# EAGLE board ad5272_arduino_ethernet_1 (EAGLE 8.1.1)
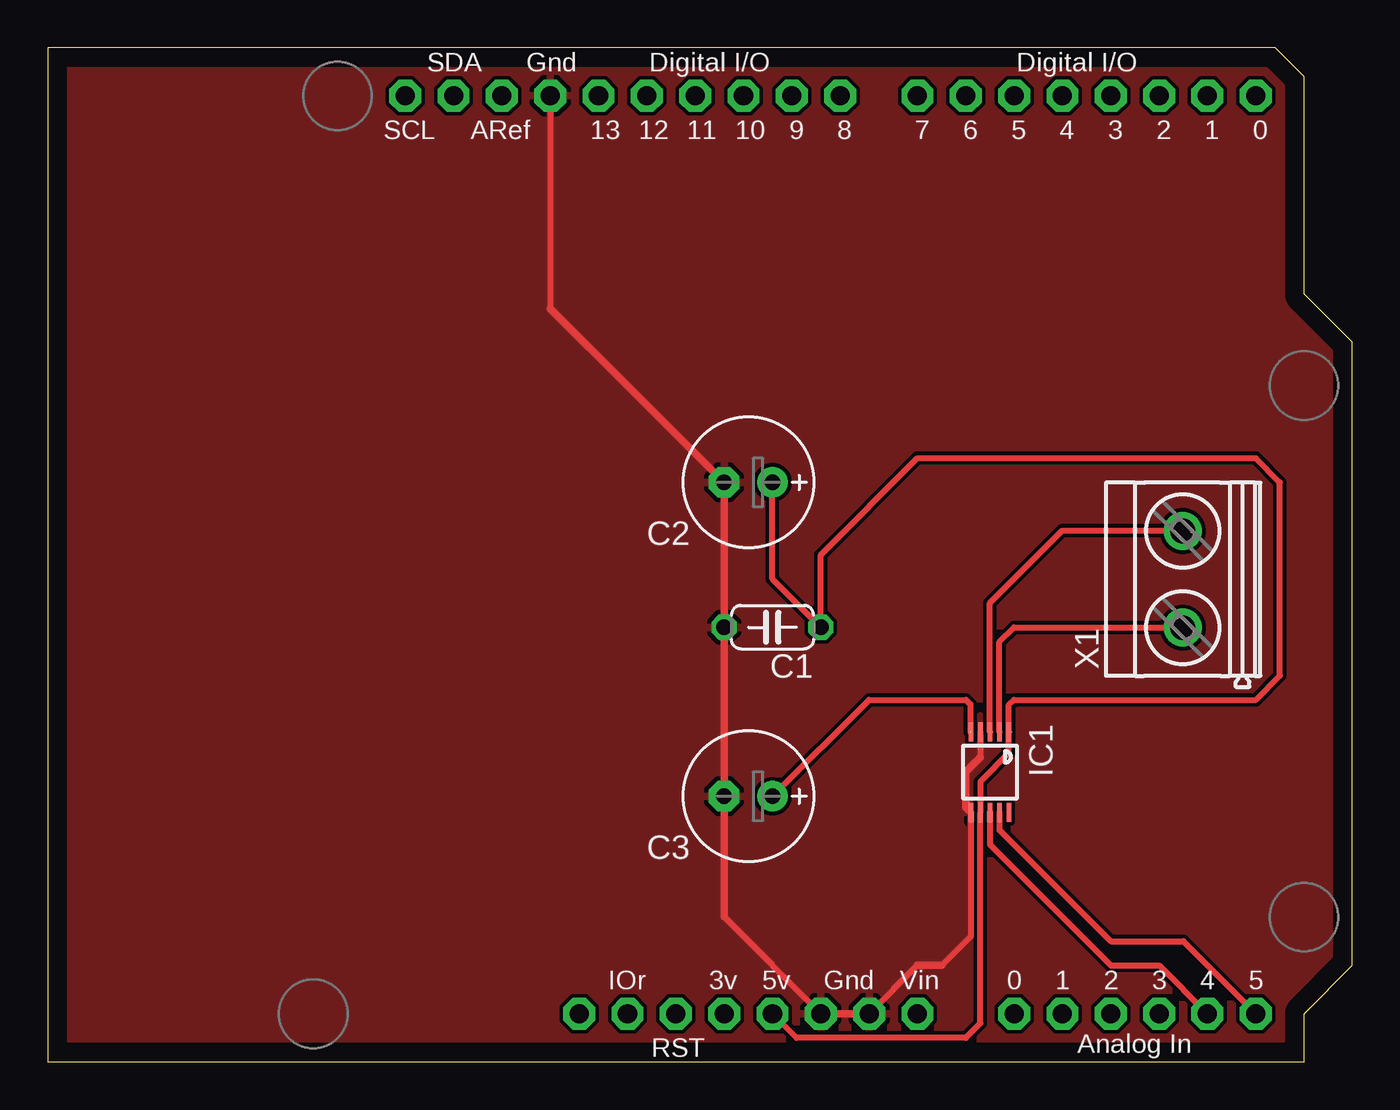
[diagram p0: board, top side]

Size 68.58 x 53.34 mm. Coordinates in mm from the lower left corner, seen from the top.
Copper layers (1*16): Top 0.035mm / dielectric 1.5mm / Bottom 0.035mm
Design rules "default": minimum track width 10mil, minimum drill 24mil, track to track 8mil, track to pad 8mil, pad to pad 8mil, via to via 8mil, smd to smd 8mil, copper to edge 40mil, drill to drill 8mil, minimum pad ring 10mil, minimum via ring 8mil, stop-mask expansion 4mil, vias tented up to drill 0mil, thermal gap 10mil

## Footprints (pad centres in the part's own frame; a part is rotated, then mirrored left to right if it is on the bottom)
C050-024X044 = drill 0.813 octagon: 1 -2.54,0; 2 2.54,0
E2,5-7 = drill 0.813 pad 1.6: + -1.27,0 | drill 0.813 pad 1.6 octagon: - 1.27,0
MSOP10 = smd 0.25 x 1: 1 -1,-2.113; 2 -0.5,-2.113; 3 0,-2.113; 4 0.5,-2.113; 5 1,-2.113; 6 1,2.113; 7 0.5,2.113; 8 0,2.113; 9 -0.5,2.113; 10 -1,2.113
ARDUINOR3 = drill 1 pad 1.676 octagon: 3V 35.56,2.54; 5V 38.1,2.54; A0 50.8,2.54; A1 53.34,2.54; A2 55.88,2.54; A3 58.42,2.54; A4 60.96,2.54; A5 63.5,2.54; AREF 23.876,50.8; D0 63.5,50.8; D1 60.96,50.8; D2 58.42,50.8; D3 55.88,50.8; D4 53.34,50.8; D5 50.8,50.8; D6 48.26,50.8; D7 45.72,50.8; D8 41.656,50.8; D9 39.116,50.8; D10 36.576,50.8; D11 34.036,50.8; D12 31.496,50.8; D13 28.956,50.8; GND 26.416,50.8; GND1 43.18,2.54; GND2 40.64,2.54; IOREF 30.48,2.54; RESERVED 27.94,2.54; RESET 33.02,2.54; SCL 18.796,50.8; SDA 21.336,50.8; VIN 45.72,2.54
MKDSN1,5/2-5,08 = drill 1.3 pad 2: 1 -2.561,0.025; 2 2.519,0.025

## Placement (x,y rotation side)
C1  [C050-024X044]  38.1,22.86 180 top
C2  [E2,5-7]  36.83,30.48 180 top
C3  [E2,5-7]  36.83,13.97 180 top
IC1  AD5272  [MSOP10]  49.53,15.24 180 top
U1  ARDUINOR3-DIMENSION  [ARDUINOR3]  0,0 0 top
X1  MKDSN1,5/2-5,08  [MKDSN1,5/2-5,08]  59.69,25.4 90 top

## Library data of the parts
C1-C3 = rcl
IC1 = aidj; MPN: AD7992BRMZ-0; OC_FARNELL: 1078311; OC_NEWARK: 31M4422
U1 = adafruit
X1 = con-phoenix-508; MPN: MKDSN 1,5/2-5.08; OC_FARNELL: 1792903; OC_NEWARK: 30M2397

## Nets
3V: U1.3V
GND: C1.2 C2.- C3.- IC1.4 IC1.6 U1.GND U1.GND1 U1.GND2
N$1: IC1.9 U1.A5
N$2: IC1.8 U1.A4
N$4: C3.+ IC1.5
N$5: C1.1 C2.+ IC1.1 IC1.7 U1.5V
N$6: IC1.3 X1.2
N$7: IC1.2 X1.1
VCC: U1.VIN

## Tracks (layer width: path | path; a pad name or v marks a point on that pad's centre or on a via)
GND
  Top 0.305: IC1.6 48.53,6.62 46.99,5.08 | 45.72,5.08 U1.GND1 | U1.GND2 35.56,7.62 | IC1.4 49.03,16.01 | U1.GND 26.42,39.62
  Top 0.406: U1.GND1 U1.GND2 | 46.99,5.08 45.72,5.08 | 35.56,7.62 C3.- C1.2 C2.- 26.42,39.62 | 49.03,16.01 48.26,15.24 48.26,13.4 48.42,13.24
  pour Top: 0,53.34 64.77,53.34 66.04,52.07 66.04,40.64 68.58,38.1 68.58,5.08 66.04,2.54 66.04,0 0,0
N$1
  Top 0.305: IC1.9 50.03,12.2 55.88,6.35 59.69,6.35 U1.A5
N$2
  Top 0.305: IC1.8 49.53,11.43 55.88,5.08 58.42,5.08 U1.A4
N$4  (1 unrouted)
  Top 0.305: C3.+ 43.18,19.05 48.26,19.05 48.5,18.81 48.5,17.35
N$5
  Top 0.305: U1.5V 39.37,1.27 48.26,1.27 49.03,2.04 IC1.7 49.03,14.74 50.53,16.24 IC1.1 50.53,18.78 50.8,19.05 63.5,19.05 64.77,20.32 64.77,30.48 63.5,31.75 45.72,31.75 40.64,26.67 C1.1 38.1,25.4 C2.+
N$6
  Top 0.305: IC1.3 49.53,24.13 53.34,27.94 59.64,27.94
  Top 0.406: 59.64,27.94 X1.2
N$7
  Top 0.305: IC1.2 50.03,22.09 50.8,22.86 59.64,22.86
  Top 0.406: 59.64,22.86 X1.1